# Altium PCB Shy-Mirror-revA.PcbDoc
Units mil, origin at the board's own origin, x right, y up, seen from the top; angles counter-clockwise.
Board outline 1430.03 x 2120.03 mil, 2 copper layers (Top Layer, Bottom Layer); 14 components, 13 nets, 113 pads, 36 vias.
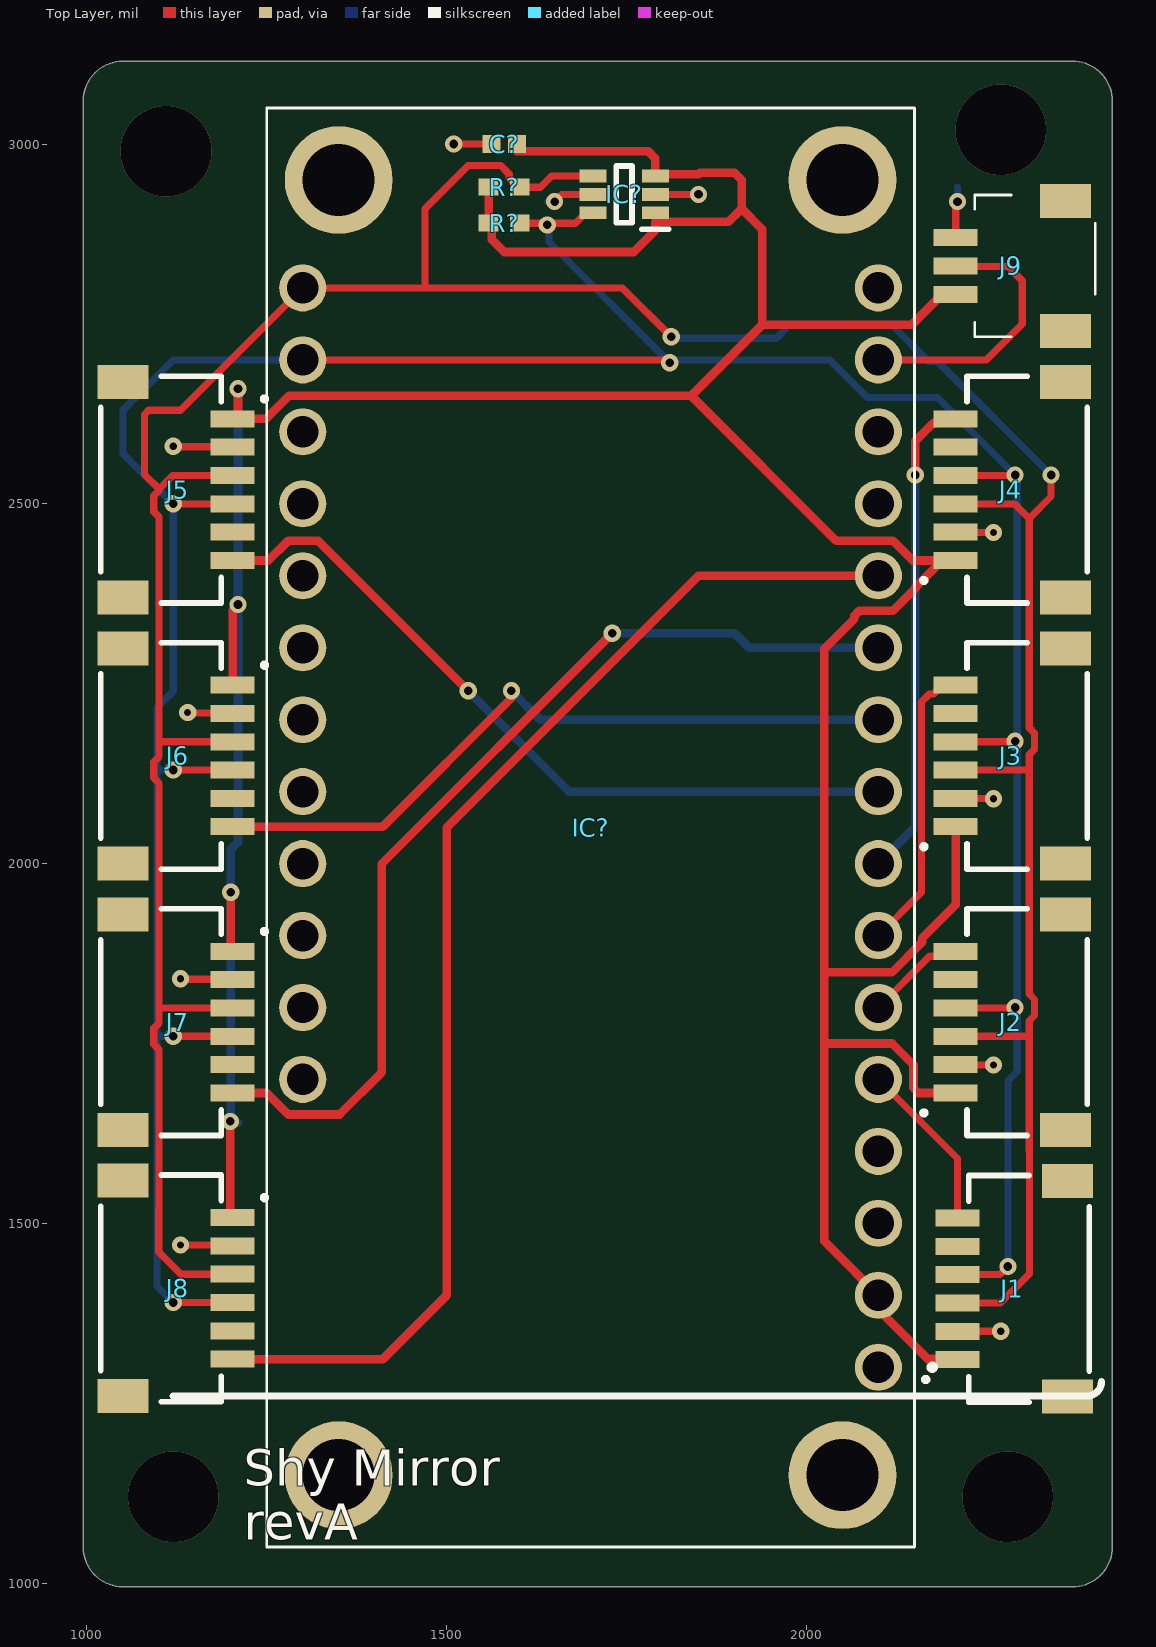
[diagram p0: Top Layer view]
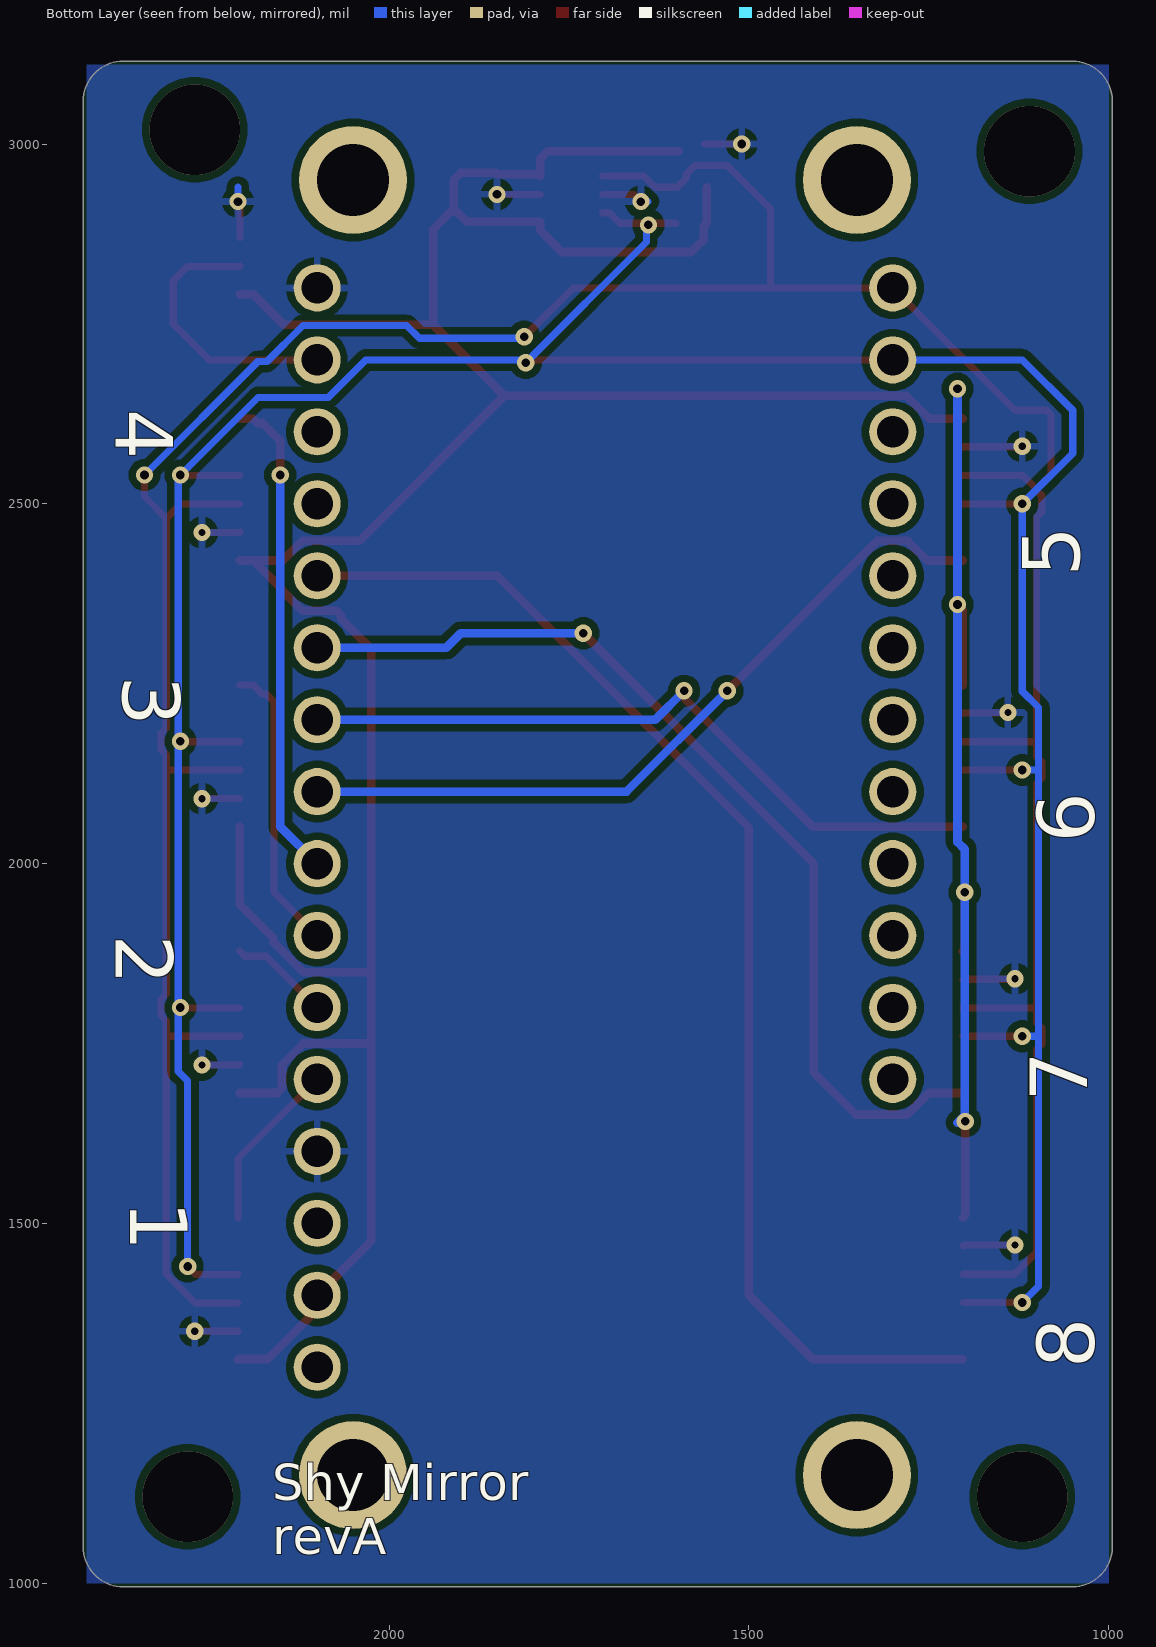
[diagram p1: Bottom Layer view, seen from below]
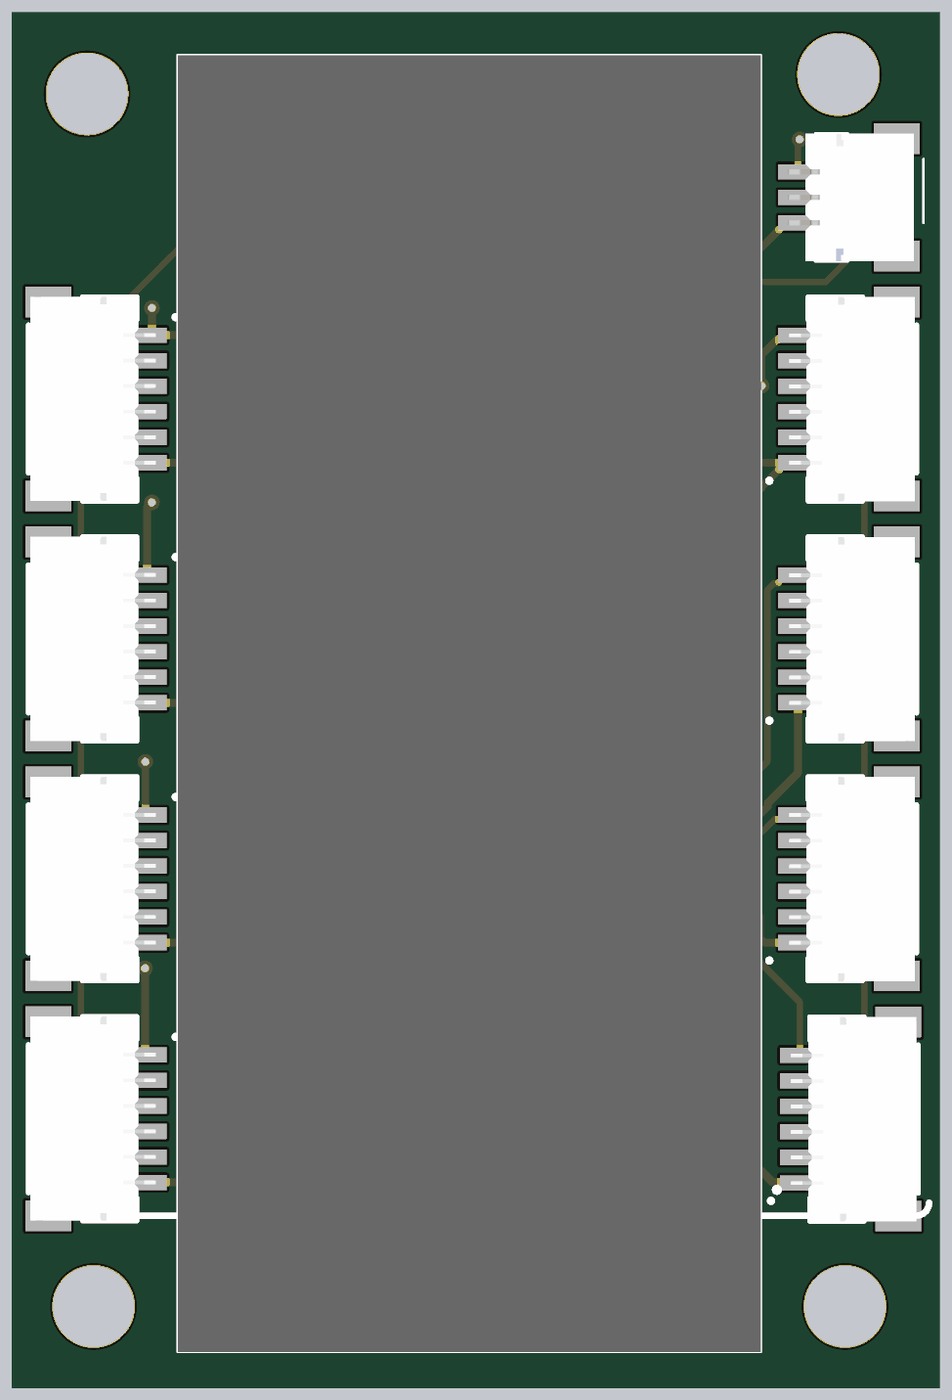
[diagram p2: 3D render of the assembled board from above, using the file's embedded part models]

## Layer stack, top to bottom
Top Solder: solder mask 0.4, Solder Resist, Dk 3.5
Top Layer: signal copper 1.4
Dielectric 1: dielectric 12.6, FR-4, Dk 4.8
Bottom Layer: signal copper 1.4
Bottom Solder: solder mask 0.4, Solder Resist, Dk 3.5

## Board outline
994.99,1050 994.98,3060 cw(c1000,3060) 994.99,3060.03 cw(c1050,3060) 1050,3115.01 2370,3115.01 cw(c2370,3060) 2425.01,3060 cw(c2420,3060) 2425.01,3059.97 2425.01,1050 cw(c2370,1050) 2370,994.99 1050,994.99 cw(c1050,1050)

## Design rules (kind name [scope] priority, off if disabled: settings)
Clearance [All] p1: gap=10 ignorepadtopadclearanceinfootprint=FALSE except(0: Arc-Hole Track-Hole SMDPad-Hole THPad-Hole Via-Hole Fill-Hole Poly-Hole Region-Hole Text-Hole)
PolygonConnect [All] p1: connectstyle=Relief reliefconductorwidth=10 reliefentries=4 polygonreliefangle="90 Angle" airgapwidth=10
RoutingVias [All] p1: holewidth=28 width=50 viastyle="Through Hole" minholewidth=12 minwidth=24 maxholewidth=12 maxwidth=24
SolderMaskExpansion [All] p1: expansion=4 istentingtop=FALSE
Width [All] p1: maxlimit=50 minlimit=10 preferedwidth=12 minimp=50.000000 maximp=50.000000 favimp=50.000000
30 further rules are at their usual default settings.

## Classes and differential pairs
component class Shy-Mirror-revA: C? IC? J1 J2 J3 J4 J5 J6 J7 J8 J9 R?

## Components (designator, comment, footprint, x,y, rotation, side; value= is the part's Value field where it differs from the comment)
C? "04025A240GAT2A" CAPC1005X56N 1580,3000 r0 top
IC? "LTC4311" SOP65P210X100-6N 1746.69,2930 r180 top
IC? "3403" 3403 2100,1300 r90 top
J1 "SM06B-SRSS-TB__LF__SN_" SM06B-SRSS-TB 2225.75,1409.06 r90 top
J2 "SM06B-SRSS-TB__LF__SN_" SM06B-SRSS-TB 2223.19,1779.61 r90 top
J3 "SM06B-SRSS-TB__LF__SN_" SM06B-SRSS-TB 2223.19,2149.61 r90 top
J4 "SM06B-SRSS-TB__LF__SN_" SM06B-SRSS-TB 2223.19,2519.61 r90 top
J5 "SM06B-SRSS-TB__LF__SN_" SM06B-SRSS-TB 1186.81,2519.61 r270 top
J6 "SM06B-SRSS-TB__LF__SN_" SM06B-SRSS-TB 1186.81,2149.61 r270 top
J7 "SM06B-SRSS-TB__LF__SN_" SM06B-SRSS-TB 1186.81,1779.61 r270 top
J8 "SM06B-SRSS-TB__LF__SN_" SM06B-SRSS-TB 1186.81,1409.61 r270 top
J9 "SM03B-SRSS-TB_LF__SN_" SM03BSRSSTBLFSN 2304.37,2830.55 r90 top
R? "CPF0402B20R5E1" RESC1005X35N 1580,2890 r0 top
R? "CPF0402B20R5E1" RESC1005X35N 1580,2940 r0 top

## Footprints (in the part's own frame and the unit in brackets; to place one, negate y for a bottom-side part, rotate by r counter-clockwise, add the part's x,y. Pads: shape width x height; smd on the part's side, far side on the other; paste and mask are expansions set on the pad)
3403 [mm]
  round 1.665 hole 1.11: 1(10.16,20.32) 2(12.7,20.32) 3(15.24,20.32) 4(17.78,20.32) 5(20.32,20.32) 6(22.86,20.32) 7(25.4,20.32) 8(27.94,20.32) 9(30.48,20.32) 10(33.02,20.32) 11(35.56,20.32) 12(38.1,20.32) 13(38.1,0) 14(35.56,0) 15(33.02,0) 16(30.48,0) 17(27.94,0) 18(25.4,0) 19(22.86,0) 20(20.32,0) 21(17.78,0) 22(15.24,0) 23(12.7,0) 24(10.16,0) 25(7.62,0) 26(5.08,0) 27(2.54,0) 28(0,0)
  round 3.81 hole 2.54: MH1(-3.81,1.27) MH2(-3.81,19.05) MH3(41.91,1.27) MH4(41.91,19.05)
  silkscreen extent -6.35,-2 44.45,21.59, body extent -6.35,-1.27 44.45,21.59, height 8.1
CAPC1005X56N [mm]
  rect 0.65x0.64 smd: 1(-0.45,0) 2(0.45,0)
  body extent -0.5,-0.25 0.5,0.25, height 0.56
RESC1005X35N [mm]
  rect 0.7x0.6 smd: 1(-0.55,0) 2(0.55,0)
  body extent -0.5,-0.25 0.5,0.25, height 0.35
SM03BSRSSTBLFSN [mm]
  rect 0.6x1.55 smd: 1(-1,2.463) 2(0,2.463) 3(1,2.463)
  rect 1.2x1.8 smd: MP1(-2.3,-1.413) MP2(2.3,-1.413)
  silkscreen extent -2.5,-2.46 2.5,1.79, body extent -2.5,-2.09 2.5,2.86, height 2.96
SM06B-SRSS-TB [mm]
  rect 0.6x1.55 smd: 1(-2.5,0.4) 2(-1.5,0.4) 3(-0.5,0.4) 4(0.5,0.4) 5(1.5,0.4) 6(2.5,0.4)
  rect 1.2x1.8 smd: 7(3.8,-3.475) 8(-3.8,-3.475)
  silkscreen extent -4,-4.25 4,1.59, body extent -4,-4.18 4,0.77, height 2.96
SOP65P210X100-6N [mm]
  rect 0.95x0.45 smd: 1(-1.1,0.65) 2(-1.1,0) 3(-1.1,-0.65) 4(1.1,-0.65) 5(1.1,0) 6(1.1,0.65)
  silkscreen extent -1.58,-1 0.28,1.22, body extent -1.05,-1 1.05,1, height 1

## Part data
C?: "Capacitor", Manufacturer_Name="Kyocera AVX", Mouser Part Number=581-04025A240GAT2A, Datasheet Link=http://www.mouser.com/catalog/supplier/library/pdf/AVXSurfaceMountCeramic.pdf, Height=0.56mm, Manufacturer_Part_Number=04025A240GAT2A, Mouser Price/Stock=https://www.mouser.co.uk/ProductDetail/AVX/04025A240GAT2A?qs=ZBeOGGPQgEEcxmEZelA7Mg%3D%3D
IC?: "Integrated Circuit", Manufacturer_Name="Analog Devices", Mouser Part Number=N/A, Datasheet Link=http://cds.linear.com/docs/en/datasheet/4311fa.pdf, Height=1mm, Manufacturer_Part_Number=LTC4311, Mouser Price/Stock=https://www.mouser.co.uk/ProductDetail/Analog-Devices/LTC4311?qs=Imq1NPwxi76zvKPfOroLUg%3D%3D
IC?: "Integrated Circuit", Manufacturer_Name=Adafruit, Mouser Part Number=485-3403, Arrow Part Number=3403, Arrow Price/Stock=https://www.arrow.com/en/products/3403/adafruit-industries?region=nac, Datasheet Link=https://www.adafruit.com/product/3403, Height=8mm, Manufacturer_Part_Number=3403, Mouser Price/Stock=https://www.mouser.co.uk/ProductDetail/Adafruit/3403?qs=5aG0NVq1C4wGaWnpUKWHHg%3D%3D
J1 J2 J3 J4 J5 J6 J7 J8: "Connector", Manufacturer_Name="JST (JAPAN SOLDERLESS TERMINALS)", Manufacturer_Part_Number="SM06B-SRSS-TB (LF)(SN)", Datasheet Link=http://uk.rs-online.com/web/p/products/5468827
J9: "Connector", Arrow Part Number=SM03B-SRSS-TB(LF)(SN), Manufacturer_Name="JST (JAPAN SOLDERLESS TERMINALS)", Mouser Part Number=306-SM03BSRSSTBLFSNP, Arrow Price/Stock=https://www.arrow.com/en/products/sm03b-srss-tb-lf-sn/jst-manufacturing?region=europe, Datasheet Link=http://www.jst-mfg.com/product/pdf/eng/eSR.pdf, Height=2.9mm, Manufacturer_Part_Number=SM03B-SRSS-TB(LF)(SN), Mouser Price/Stock=https://www.mouser.co.uk/ProductDetail/JST-Commercial/SM03B-SRSS-TBLFSN?qs=cdbOS8ANM9DY%2Fg%2FPQv5Kng%3D%3D
R? R?: "Resistor", Manufacturer_Name="TE Connectivity", Datasheet Link=http://www.farnell.com/datasheets/1786775.pdf, Height=0.35mm, Manufacturer_Part_Number=CPF0402B20R5E1

## Via types
v1: diameter 24, hole 12, Top Layer to Bottom Layer, tented both sides, 20 vias
v2: diameter 24, hole 10, Top Layer to Bottom Layer, tented both sides, 8 vias
v3: diameter 125.98, hole 125.98, Top Layer to Bottom Layer, 4 vias
v4: diameter 24, hole 12, Top Layer to Bottom Layer, 3 vias
v5: diameter 24, hole 12, Top Layer to Bottom Layer, tented top, 1 vias

## Nets (pads, with @x,y where several pads share a name; then routed paths per layer and width w, separated by ;. In a path a pad name is that pad's centre, name@x,y a point inside that pad or via, vN(x,y) a via of type N, cw(c..) or ccw(c..) an arc to the next point about the centre after c; other vN are vias at no path point)
3V3: C?.2 IC?.1@1790,2904.41 IC?.3@1790,2955.59 IC?.27 J1.1 J2.1 J3.1 J4.1 J5.1 J6.1 J7.1 J8.1 J9.1 R?.1 | length 5845.5
  Top Layer w12: v5(1199.41,1641.64) 1199.41,1511.18 J8.1 ; v1(1200,1960) 1200,1880.59 J7.1 ; J6.1 1202.56,2352.56 v1(1210,2360) ; J5.1 J5.1@1204.19,2618.03 ; v1(1210,2660) 1210,2623.84 J5.1@1204.19,2618.03 ; R?.1@1558.35,2940 1558.35,2890 1562.7,2885.65 1562.7,2867.3 1580,2850 1760,2850 1790,2880 1790,2892.2 1892.2,2892.2 1910,2910 ; C?.2@1597.72,2990 1780,2990 1790,2980 1790,2955.59 1792.41,2958 1850.13,2958 1852.13,2960 1900,2960 1910,2950 1910,2910 ; 2024.97,1750 2118.98,1750 2148.78,1720.2 2148.78,1688.21 2155.81,1681.18 J2.1 ; 2024.97,1848.78 2118.78,1848.78 2160.93,1890.93 2160.93,1896.47 2207.44,1942.98 J3.1 ; J9.1 2188.7,2791.18 2146.3,2748.78 1938.78,2748.78 ; J4.1 J4.1@2188.74,2421.18 ; J1.1 2209.15,1311.48 2168.52,1311.48 2110.25,1369.75 2110.25,1389.75 2024.97,1475.03 2024.97,2298.48 2066.49,2340 2066.49,2344.19 2073.52,2351.22 2120.2,2351.22 2151.57,2382.59 2151.57,2384.01 J4.1@2188.74,2421.18 ; J5.1@1204.19,2618.03 1249.05,2618.03 1281.02,2650 1840,2650 ; 1840,2650 1938.78,2748.78 ; 1840,2650 2041.22,2448.78 2120.2,2448.78 2147.8,2421.18 J4.1@2188.74,2421.18 ; 1910,2910 1938.78,2881.22 1938.78,2748.78
  Bottom Layer w12: v5(1199.41,1641.64) 1201.05,1640 1210,1640 1200,1650 v1(1200,1960) 1200,2020 1210,2030 v1(1210,2360) v1(1210,2660)
GND: C?.1 IC?.2@1790,2930 IC?.5@1703.39,2930 IC?.13 IC?.25 J1.2 J2.2 J3.2 J4.2 J5.2 J6.2 J7.2 J8.2 J9.3 | length 765.6
  Top Layer w10: v2(1120,2580) 1120.67,2579.33 1201.89,2579.33 J5.2 ; v2(1130,1470) 1201.22,1470 J8.2 ; v2(1130,1840) 1130.67,1839.33 1201.89,1839.33 J7.2 ; v2(1140,2210) 1140.67,2209.33 1201.89,2209.33 J6.2 ; v1(1510,3000) C?.1 ; v1(1650,2920) 1660,2930 IC?.5@1703.39,2930 ; IC?.2@1790,2930 v1(1850,2930) ; J9.3 2207.4,2917.4 v1(2210,2920) ; J2.2 2207.72,1720.28 2259.72,1720.28 v2(2260,1720) ; J3.2 2207.72,2090.28 2259.72,2090.28 v2(2260,2090) ; J4.2 2207.72,2460.28 2259.72,2460.28 v2(2260,2460) ; J1.2 v2(2270,1350)
  Bottom Layer w10: v1@1640,2920 v1(1650,2920) ; v1(1850,2930) v1@1852.68,2932.68 ; v1(2210,2920) 2210,2940
HALL: IC?.14 J9.2 | length 381.8
  Top Layer w10: IC?.14 2250,2700 2300,2750 2300,2810 2280,2830 2207.95,2830 J9.2
SCL: IC?.6@1703.39,2904.41 IC?.11 J1.4 J2.4 J3.4 J4.4 J5.4 J6.4 J7.4 J8.4 R?.2@1601.65,2890 | length 4805.9
  Top Layer w10: v1(1120,1390) v1(1120,1390) 1202.52,1389.96 J8.4 ; v1(1120,1760) 1120.43,1760 1120.51,1759.92 J7.4 ; v1(1120,2130) 1202.48,2130 J6.4 ; v1(1120,2500) 1120.43,2500 1120.51,2499.92 J5.4 ; IC?.11 1810,2700 v1(1810,2696) ; R?.2@1601.65,2890 1679.13,2890 1693.54,2904.41 IC?.6@1703.39,2904.41 ; J2.4 2288.86,1799.29 2289.57,1800 v1(2290,1800) ; J3.4 2289.29,2169.29 v1(2290,2170) ; J4.4 v1@2290,2539.29 ; J1.4 2268.74,1428.74 v1(2280,1440)
  Bottom Layer w10: v1(1120,1390) 1097.43,1412.57 1097.43,1760 ; v1(1120,1760) 1097.43,1760 ; v1(1120,2130) 1097.43,2130 ; IC?.11 1120,2700 1050,2630 1050,2570 v1(1120,2500) 1120,2239.42 1097.43,2216.85 1097.43,2130 ; v1(1639.63,2887.62) 1642.31,2884.94 1642.31,2863.69 v1(1810,2696) 1810,2700 2032.44,2700 2084.66,2647.78 2182.22,2647.78 v1(2290,2540) 2293,2537 2293,1711.12 2280,1698.12 v1(2280,1440) ; 1097.43,1760 1097.43,2130
SDA: IC?.4@1703.39,2955.59 IC?.12 J1.3 J2.3 J3.3 J4.3 J5.3 J6.3 J7.3 J8.3 R?.2@1601.65,2940 | length 5033.7
  Top Layer w10: J8.3 1130.71,1429.29 1100,1460 1100,1519.78 1100.43,1520.22 1100.43,1741.38 1093,1748.82 1093,1771.18 1100.43,1778.62 1100.43,1800 ; J7.3 1101.14,1799.29 1100.43,1800 ; J6.3 1101.14,2169.29 1100.43,2170 ; J5.3 1119.29,2539.29 1100.43,2520.43 ; IC?.4@1703.39,2955.59 1646.02,2955.59 1630.43,2940 1601.65,2940 1599.68,2940 1587.13,2952.56 1587.13,2958.02 1575.15,2970 1530,2970 1470,2910 1470,2800 ; v1(1812.09,2732.09) 1744.18,2800 1470,2800 ; J2.3 2309.49,1759.92 2309.57,1760 ; J3.3 2309.49,2129.92 2309.57,2130 ; J4.3 2289.21,2499.92 2309.57,2479.57 ; J1.3 2269.37,1389.37 2310,1430 2310,1599.73 2309.57,1600.16 2309.57,1760 ; v1(2340,2540) 2340,2510 2309.57,2479.57 ; 1100.43,1800 1100.43,2111.38 1093,2118.82 1093,2141.18 1100.43,2148.62 1100.43,2170 ; 1100.43,2170 1100.43,2481.38 1093,2488.82 1093,2511.18 1100.43,2518.62 1100.43,2520.43 ; 1100.43,2520.43 1080,2540.87 1080,2624.14 1085.86,2630 1130,2630 IC?.12 1470,2800 ; 2309.57,1760 2309.57,1781.38 2317,1788.82 2317,1811.18 2309.57,1818.62 2309.57,2130 ; 2309.57,2130 2309.57,2151.38 2317,2158.82 2317,2181.18 2309.57,2188.62 2309.57,2479.57
  Bottom Layer w10: v1(1812.09,2732.09) 1814.18,2730 1957.9,2730 1975.68,2747.78 2119.79,2747.78 2170,2697.56 2182.44,2697.56 v1(2340,2540)
XSHT_1: IC?.24 J1.6 | length 238.1
  Top Layer w10: IC?.24 2210,1590 J1.6
XSHT_2: IC?.23 J2.6 | length 139.8
  Top Layer w10: IC?.23 2171.22,1871.22 2200.63,1871.22 J2.6
XSHT_3: IC?.22 J3.6 | length 406.7
  Top Layer w10: IC?.22 2160,1960 2160,2224.76 2170.72,2235.47 2176.18,2235.47 2188.74,2248.03 J3.6
XSHT_4: IC?.21 J4.6 | length 677.5
  Top Layer w12: v1(2151.21,2539.97) 2151.21,2587.39 2170.3,2606.47 2174.8,2610.97 2175.9,2610.97 2177.15,2612.22 2182.93,2612.22 2188.74,2618.03 J4.6
  Bottom Layer w12: IC?.21 2151.21,2051.21 v1(2151.21,2539.97)
XSHT_5: IC?.20 J5.6 | length 1053.3
  Top Layer w12: J5.6 1252.2,2421.18 1279.8,2448.78 1321.22,2448.78 v4(1530,2240)
  Bottom Layer w12: v4(1530,2240) 1670,2100 IC?.20
XSHT_6: IC?.19 J6.6 | length 998.1
  Top Layer w12: J6.6 1411.18,2051.18 1590,2230 v4(1590,2240)
  Bottom Layer w12: v4(1590,2240) 1630,2200 IC?.19
XSHT_7: IC?.18 J7.6 | length 1365
  Top Layer w12: J7.6 1249.84,1681.18 1279.8,1651.22 1351.22,1651.22 1410,1710 1410,2000 v4(1730,2320)
  Bottom Layer w12: v4(1730,2320) 1900.53,2320 1920.53,2300 IC?.18
XSHT_8: IC?.17 J8.6 | length 1729.2
  Top Layer w12: J8.6 1411.18,1311.18 1500,1400 1500,2050 1850,2400 IC?.17
pads on no net: IC?.1@1300,1700 IC?.2@1300,1800 IC?.3@1300,1900 IC?.4@1300,2000 IC?.5@1300,2100 IC?.6@1300,2200 IC?.7 IC?.8 IC?.9 IC?.10 IC?.15 IC?.16 IC?.26 IC?.28 IC?.MH1 IC?.MH2 IC?.MH3 IC?.MH4 J1.5 J1.7 J1.8 J2.5 J2.7 J2.8 J3.5 J3.7 J3.8 J4.5 J4.7 J4.8 J5.5 J5.7 J5.8 J6.5 J6.7 J6.8 J7.5 J7.7 J7.8 J8.5 J8.7 J8.8 J9.MP1 J9.MP2
copper on no net:
  other v3: 1120,1120 2280,1120 1110,2990 2270,3020

## Polygon pours and split planes (outlines as drawn)
GND on Bottom Layer "NONET_L-01_P-001" (solid, pour order 0): 1000,1000 1000,3110 2420,3110 2420,1000 1050,1000

## Silkscreen, mask and mechanical layers (free items; w line width, h text height)
Top Overlay:
  lines w10: 1120,1260 2390,1260 ccw(c2390,1280) 2410,1280
  text "Shy Mirror  / revA" at 1217.81,1060 h50
Bottom Overlay:
  text "4" at 2380,2631.1 h80 r90
  text "5" at 1040,2398.9 h80 r270
  text "3" at 2370,2261.1 h80 r90
  text "6" at 1020,2028.9 h80 r270
  text "2" at 2380,1901.1 h80 r90
  text "7" at 1030,1668.9 h80 r270
  text "1" at 2360,1531.1 h80 r90
  text "8" at 1020,1298.9 h80 r270
  text "Shy Mirror  / revA" at 2162.19,1040 h50
Board:
  lines w10: 1270,1000 2370,1000 ccw(c2370,1050) 2420,1050 2420,3060 ccw(c2370,3060) 2370,3110 1050,3110 ccw(c1050,3060) 1000,3060 1000,1050 ccw(c1050,1050) 1050,1000 1280,1000